# Altium PCB PCB3_aa.PcbDoc (part 3 of 4)
Units mm, origin at the board's own origin, x right, y up, seen from the top; angles counter-clockwise.
Board outline 85.6 x 54 mm, 2 copper layers (Top Layer, Bottom Layer); 41 components, 25 nets, 168 pads, 97 vias.
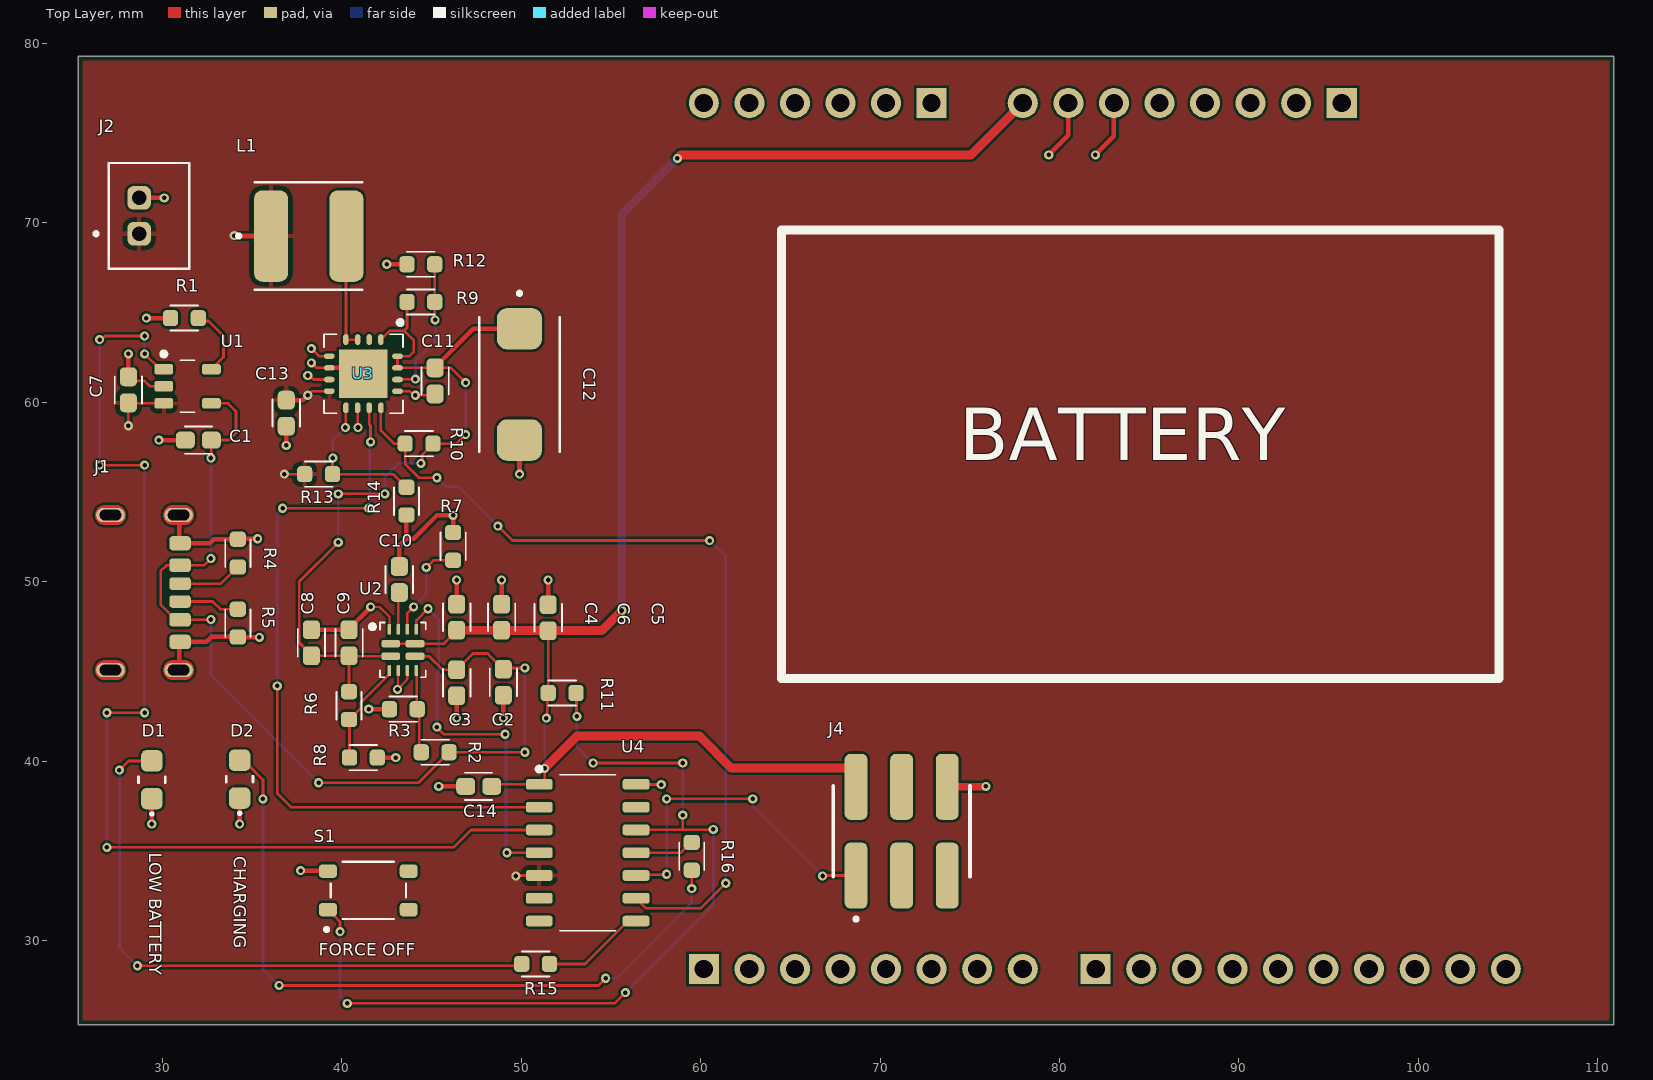
[diagram p0: Top Layer view]

## Part data (continued)
R7: library part "RESISTOR - GENERIC", "Res Thick Film 0603 21.5K Ohm 1% 0.1W(1/10W) ±100ppm/C Pad SMD T/R", .Case/Package=0603, .Tolerance=1%, Manufacturer="Yageo Group", Manufacturer Part Number=RC0603FR-0721K5L, Max Operating Temperature=155°C, Max Power Dissipation=100mW, Min Operating Temperature=-55°C, Supplier Part Number=603-RC0603FR-0721K5L, Temperature Coefficient=100ppm/°C, Voltage Rating=75V, Voltage Rating (DC)=50V, Case Code (Imperial)=0603, Case/Package=0603, Category="Chip SMD Resistors", China RoHS=Non-Compliant, ComponentLink1Description=https://datasheet.octopart.com:443/RC0603FR-0721K5L-Yageo-datasheet-175887523.pdf?src-supplier=Newark, ComponentLink1URL=https://datasheet.octopart.com:443/RC0603FR-0721K5L-Yageo-datasheet-175887523.pdf?src-supplier=Newark, ComponentLink2Description=https://datasheet.octopart.com:443/RC0603FR-0721K5L-Yageo-datasheet-103092701.pdf?src-supplier=Upverter, ComponentLink2URL=https://datasheet.octopart.com:443/RC0603FR-0721K5L-Yageo-datasheet-103092701.pdf?src-supplier=Upverter, ComponentLink3Description=https://datasheet.octopart.com:443/RC0603FR-0721K5L-Yageo-Group-datasheet-189192902.pdf?src-supplier=TME, ComponentLink3URL=https://datasheet.octopart.com:443/RC0603FR-0721K5L-Yageo-Group-datasheet-189192902.pdf?src-supplier=TME, ComponentLink4Description=https://datasheet.octopart.com:443/RC0603FR-0721K5L-Yageo-Group-datasheet-176638170.pdf?src-supplier=TME, ComponentLink4URL=https://datasheet.octopart.com:443/RC0603FR-0721K5L-Yageo-Group-datasheet-176638170.pdf?src-supplier=TME, ComponentLink5Description=https://datasheet.octopart.com:443/RC0603FR-0721K5L-Yageo-datasheet-164759695.pdf?src-supplier=Future+Electronics, ComponentLink5URL=https://datasheet.octopart.com:443/RC0603FR-0721K5L-Yageo-datasheet-164759695.pdf?src-supplier=Future+Electronics, ComponentLink6Description=https://datasheet.octopart.com:443/RC0603FR-0721K5L-Yageo-datasheet-137700087.pdf?src-supplier=Future+Electronics, ComponentLink6URL=https://datasheet.octopart.com:443/RC0603FR-0721K5L-Yageo-datasheet-137700087.pdf?src-supplier=Future+Electronics, ComponentLink7Description=https://datasheet.octopart.com:443/RC0603FR-0721K5L-Yageo-datasheet-15599030.pdf?src-supplier=Future+Electronics, ComponentLink7URL=https://datasheet.octopart.com:443/RC0603FR-0721K5L-Yageo-datasheet-15599030.pdf?src-supplier=Future+Electronics, ComponentLink8Description=https://datasheet.octopart.com:443/RC0603FR-0721K5L-Yageo-datasheet-12596169.pdf?src-supplier=Future+Electronics, ComponentLink8URL=https://datasheet.octopart.com:443/RC0603FR-0721K5L-Yageo-datasheet-12596169.pdf?src-supplier=Future+Electronics, ComponentLink9Description=https://datasheet.octopart.com:443/RC0603FR-0721K5L-Yageo-datasheet-8328172.pdf?src-supplier=Future+Electronics, ComponentLink9URL=https://datasheet.octopart.com:443/RC0603FR-0721K5L-Yageo-datasheet-8328172.pdf?src-supplier=Future+Electronics, ComponentLink10Description=https://datasheet.octopart.com/RC0603FR-0721K5L-Yageo-datasheet-73766026.pdf, ComponentLink10URL=https://datasheet.octopart.com/RC0603FR-0721K5L-Yageo-datasheet-73766026.pdf, ComponentLink11Description=https://datasheet.octopart.com:443/RC0603FR-0721K5L-Yageo-datasheet-118562.pdf?src-supplier=DigiKey, ComponentLink11URL=https://datasheet.octopart.com:443/RC0603FR-0721K5L-Yageo-datasheet-118562.pdf?src-supplier=DigiKey, ComponentLink12Description=http://sigma.octopart.com:80/conflict_mineral_statement/Yageo-company-3.pdf?src-supplier=Compliance+Statements, ComponentLink12URL=http://sigma.octopart.com:80/conflict_mineral_statement/Yageo-company-3.pdf?src-supplier=Compliance+Statements, ComponentLink13Description=http://sigma.octopart.com:80/rohs_statement/Yageo-company-2.pdf?src-supplier=Compliance+Statements, ComponentLink13URL=http://sigma.octopart.com:80/rohs_statement/Yageo-company-2.pdf?src-supplier=Compliance+Statements, Composition="Thick Film", Depth=800µm, Features="Moisture Resistant", Height=450µm, Lead Free="Lead Free", Length=1.6mm, Lifecycle Status=Production, Military Standard=Not, Mounting Technology="Surface Mount", Number of Terminals=2, Number of Terminations=2, Power Dissipation=100mW, Power Rating=100mW, Pricing="1=0,1, 10=0,006, 50=0,006, 100=0,006, 1000=0,006, 10000=0,002 (USD)", REACH SVHC=Yes, RoHS=Compliant, Schedule B="8533210045, 8533210045|8533210045, 8533210045|8533210045|8533210045, 8533210045|8533210045|8533210045|8533210045", Stock=1866808, Supplier=Mouser, Supplier 1=Mouser, Supplier Part Number 1=603-RC0603FR-0721K5L, Termination=SMD/SMT, Tolerance=1%, Width=800µm, Working Voltage=75V
R9: library part "RESISTOR - GENERIC", "Res Thick Film 0603 1.8M Ohm 1% 0.1W(1/10W) +/-100ppm/ﾟC Epoxy SMD T/R", .Case/Package=0603, .Tolerance=1%, Case Code (Metric)=1608, Manufacturer="Yageo Group", Manufacturer Part Number=RC0603FR-071M8L, Max Operating Temperature=155°C, Max Power Dissipation=100mW, Min Operating Temperature=-55°C, Supplier Part Number=YAG3328CT-ND, Temperature Coefficient=100ppm/°C, Voltage Rating=75V, Voltage Rating (AC)=50V, Case Code (Imperial)=0603, Case/Package=0603, Category="Chip SMD Resistors", China RoHS=Non-Compliant, ComponentLink1Description=https://datasheet.octopart.com:443/RC0603FR-071M8L-Yageo-datasheet-175887523.pdf?src-supplier=Newark, ComponentLink1URL=https://datasheet.octopart.com:443/RC0603FR-071M8L-Yageo-datasheet-175887523.pdf?src-supplier=Newark, ComponentLink2Description=https://datasheet.octopart.com:443/RC0603FR-071M8L-Yageo-datasheet-103092701.pdf?src-supplier=Upverter, ComponentLink2URL=https://datasheet.octopart.com:443/RC0603FR-071M8L-Yageo-datasheet-103092701.pdf?src-supplier=Upverter, ComponentLink3Description=https://datasheet.octopart.com:443/RC0603FR-071M8L-Yageo-datasheet-8328172.pdf?src-supplier=element14+APAC, ComponentLink3URL=https://datasheet.octopart.com:443/RC0603FR-071M8L-Yageo-datasheet-8328172.pdf?src-supplier=element14+APAC, ComponentLink4Description=https://datasheet.octopart.com:443/RC0603FR-071M8L-Yageo-datasheet-62067350.pdf?src-supplier=Farnell, ComponentLink4URL=https://datasheet.octopart.com:443/RC0603FR-071M8L-Yageo-datasheet-62067350.pdf?src-supplier=Farnell, ComponentLink5Description=https://datasheet.octopart.com:443/RC0603FR-071M8L-Yageo---Phycomp-datasheet-34211833.pdf?src-supplier=Farnell, ComponentLink5URL=https://datasheet.octopart.com:443/RC0603FR-071M8L-Yageo---Phycomp-datasheet-34211833.pdf?src-supplier=Farnell, ComponentLink6Description=https://datasheet.octopart.com:443/RC0603FR-071M8L-Yageo-datasheet-164759695.pdf?src-supplier=Future+Electronics, ComponentLink6URL=https://datasheet.octopart.com:443/RC0603FR-071M8L-Yageo-datasheet-164759695.pdf?src-supplier=Future+Electronics, ComponentLink7Description=https://datasheet.octopart.com:443/RC0603FR-071M8L-Yageo-datasheet-137700087.pdf?src-supplier=Future+Electronics, ComponentLink7URL=https://datasheet.octopart.com:443/RC0603FR-071M8L-Yageo-datasheet-137700087.pdf?src-supplier=Future+Electronics, ComponentLink8Description=https://datasheet.octopart.com:443/RC0603FR-071M8L-Yageo-datasheet-27584510.pdf?src-supplier=Future+Electronics, ComponentLink8URL=https://datasheet.octopart.com:443/RC0603FR-071M8L-Yageo-datasheet-27584510.pdf?src-supplier=Future+Electronics, ComponentLink9Description=https://datasheet.octopart.com:443/RC0603FR-071M8L-Yageo-datasheet-15599030.pdf?src-supplier=Future+Electronics, ComponentLink9URL=https://datasheet.octopart.com:443/RC0603FR-071M8L-Yageo-datasheet-15599030.pdf?src-supplier=Future+Electronics, ComponentLink10Description=https://datasheet.octopart.com:443/RC0603FR-071M8L-Yageo-datasheet-12596169.pdf?src-supplier=Future+Electronics, ComponentLink10URL=https://datasheet.octopart.com:443/RC0603FR-071M8L-Yageo-datasheet-12596169.pdf?src-supplier=Future+Electronics, ComponentLink11Description=https://datasheet.octopart.com:443/RC0603FR-071M8L-Yageo-datasheet-148775077.pdf?src-supplier=TME, ComponentLink11URL=https://datasheet.octopart.com:443/RC0603FR-071M8L-Yageo-datasheet-148775077.pdf?src-supplier=TME, ComponentLink12Description=https://datasheet.octopart.com/RC0603FR-071M8L-Yageo-datasheet-73766026.pdf, ComponentLink12URL=https://datasheet.octopart.com/RC0603FR-071M8L-Yageo-datasheet-73766026.pdf, ComponentLink13Description=http://sigma.octopart.com:80/rohs_statement/Yageo-company-2.pdf?src-supplier=Compliance+Statements, ComponentLink13URL=http://sigma.octopart.com:80/rohs_statement/Yageo-company-2.pdf?src-supplier=Compliance+Statements, ComponentLink14Description=http://sigma.octopart.com:80/conflict_mineral_statement/Yageo-company-3.pdf?src-supplier=Compliance+Statements, ComponentLink14URL=http://sigma.octopart.com:80/conflict_mineral_statement/Yageo-company-3.pdf?src-supplier=Compliance+Statements, Composition="Thick Film", Depth=800µm, Features="Moisture Resistant", Height=450µm, Lead Free="Lead Free", Length=1.6mm, Lifecycle Status=Production, Military Standard=Not, Mounting Technology="Surface Mount", Number of Terminals=2, Number of Terminations=2, Packaging="Cut Tape", Pins=2, Power Dissipation=100mW, Power Rating=100mW, Pricing="1=0,1, 10=0,011, 25=0,0092, 50=0,0072, 100=0,0068, 250=0,00568 (USD)", REACH SVHC=Yes, RoHS=Compliant, Schedule B="8533210045, 8533210045|8533210045|8533210045|8533210045|8533210045", Stock=2687, Supplier=DigiKey, Supplier 1=DigiKey, Supplier Part Number 1=YAG3328CT-ND, Termination=SMD/SMT, Tolerance=1%, Voltage Rating (DC)=50V, Width=800µm, Working Voltage=75V
R10: library part "RESISTOR - GENERIC", "Chip Resistor Automotive Grade Thick Film 0603 1MOhm 1% Paper T/R", .Case/Package=0603, .Tolerance=1%, Manufacturer="Yageo Group", Manufacturer Part Number=AC0603FR-7W1ML, Max Operating Temperature=155°C, Min Operating Temperature=-55°C, Power Dissipation=200mW, Supplier Part Number=13-AC0603FR-7W1MLCT-ND, Temperature Coefficient=100ppm/°C, Voltage Rating=75V, Case/Package=0603, Category="Chip SMD Resistors", China RoHS=Non-Compliant, ComponentLink1Description=https://datasheet.octopart.com:443/AC0603FR-7W1ML-Yageo-datasheet-182189377.pdf?src-supplier=IHS, ComponentLink1URL=https://datasheet.octopart.com:443/AC0603FR-7W1ML-Yageo-datasheet-182189377.pdf?src-supplier=IHS, ComponentLink2Description=https://datasheet.octopart.com:443/AC0603FR-7W1ML-Yageo-datasheet-86786639.pdf?src-supplier=Upverter, ComponentLink2URL=https://datasheet.octopart.com:443/AC0603FR-7W1ML-Yageo-datasheet-86786639.pdf?src-supplier=Upverter, ComponentLink3Description=https://datasheet.octopart.com/AC0603FR-7W1ML-Yageo-datasheet-12512238.pdf, ComponentLink3URL=https://datasheet.octopart.com/AC0603FR-7W1ML-Yageo-datasheet-12512238.pdf, ComponentLink4Description=http://sigma.octopart.com:80/rohs_statement/Yageo-company-2.pdf?src-supplier=Compliance+Statements, ComponentLink4URL=http://sigma.octopart.com:80/rohs_statement/Yageo-company-2.pdf?src-supplier=Compliance+Statements, ComponentLink5Description=http://sigma.octopart.com:80/conflict_mineral_statement/Yageo-company-3.pdf?src-supplier=Compliance+Statements, ComponentLink5URL=http://sigma.octopart.com:80/conflict_mineral_statement/Yageo-company-3.pdf?src-supplier=Compliance+Statements, Composition="Thick Film", Height=450µm, Lifecycle Status=Production, Mounting Technology="Surface Mount", Number of Terminals=2, Packaging="Tape & Reel", Power Rating=200mW, Pricing="1=0,1, 10=0,016, 25=0,0132, 50=0,0102, 100=0,0092 (USD)", REACH SVHC=Yes, RoHS=Compliant, Stock=95338, Supplier=DigiKey, Supplier 1=DigiKey, Supplier Part Number 1=13-AC0603FR-7W1MLCT-ND, Tolerance=1%, Width=800µm, Working Voltage=75V
R12: library part "RESISTOR - GENERIC", "Res Thick Film 0603 200K Ohm 1% 0.1W(1/10W) ±100ppm/C Pad SMD T/R", .Case/Package=0603, .Tolerance=1%, Manufacturer="Yageo Group", Manufacturer Part Number=RC0603FR-07200KL, Max Operating Temperature=155°C, Max Power Dissipation=100mW, Min Operating Temperature=-55°C, Supplier Part Number=311-200KHRCT-ND, Temperature Coefficient=100ppm/°C, Voltage Rating=75V, Voltage Rating (DC)=50V, Case Code (Imperial)=0603, Case/Package=0603, Category="Chip SMD Resistors", China RoHS=Non-Compliant, ComponentLink1Description=https://datasheet.octopart.com:443/RC0603FR-07200KL-Yageo-datasheet-175887523.pdf?src-supplier=IHS, ComponentLink1URL=https://datasheet.octopart.com:443/RC0603FR-07200KL-Yageo-datasheet-175887523.pdf?src-supplier=IHS, ComponentLink2Description=https://datasheet.octopart.com:443/RC0603FR-07200KL-Yageo-datasheet-141265859.pdf?src-supplier=Upverter, ComponentLink2URL=https://datasheet.octopart.com:443/RC0603FR-07200KL-Yageo-datasheet-141265859.pdf?src-supplier=Upverter, ComponentLink3Description=https://datasheet.octopart.com:443/RC0603FR-07200KL-Yageo-datasheet-103092701.pdf?src-supplier=Upverter, ComponentLink3URL=https://datasheet.octopart.com:443/RC0603FR-07200KL-Yageo-datasheet-103092701.pdf?src-supplier=Upverter, ComponentLink4Description=https://sigma.octopart.com:443/138820526/technical_drawing/Yageo-RC0603FR-07200KL.pdf?src-supplier=Upverter, ComponentLink4URL=https://sigma.octopart.com:443/138820526/technical_drawing/Yageo-RC0603FR-07200KL.pdf?src-supplier=Upverter, ComponentLink5Description=https://datasheet.octopart.com:443/RC0603FR-07200KL-Yageo-datasheet-8328172.pdf?src-supplier=Burklin+Elektronik, ComponentLink5URL=https://datasheet.octopart.com:443/RC0603FR-07200KL-Yageo-datasheet-8328172.pdf?src-supplier=Burklin+Elektronik, ComponentLink6Description=https://datasheet.octopart.com:443/RC0603FR-07200KL-Yageo-datasheet-62067350.pdf?src-supplier=Farnell, ComponentLink6URL=https://datasheet.octopart.com:443/RC0603FR-07200KL-Yageo-datasheet-62067350.pdf?src-supplier=Farnell, ComponentLink7Description=https://datasheet.octopart.com:443/RC0603FR-07200KL-Yageo-datasheet-34211833.pdf?src-supplier=element14+APAC, ComponentLink7URL=https://datasheet.octopart.com:443/RC0603FR-07200KL-Yageo-datasheet-34211833.pdf?src-supplier=element14+APAC, ComponentLink8Description=https://datasheet.octopart.com:443/RC0603FR-07200KL-Yageo-datasheet-164759695.pdf?src-supplier=Future+Electronics, ComponentLink8URL=https://datasheet.octopart.com:443/RC0603FR-07200KL-Yageo-datasheet-164759695.pdf?src-supplier=Future+Electronics, ComponentLink9Description=https://datasheet.octopart.com:443/RC0603FR-07200KL-Yageo-datasheet-137700087.pdf?src-supplier=Future+Electronics, ComponentLink9URL=https://datasheet.octopart.com:443/RC0603FR-07200KL-Yageo-datasheet-137700087.pdf?src-supplier=Future+Electronics, ComponentLink10Description=https://datasheet.octopart.com:443/RC0603FR-07200KL-Yageo-datasheet-15599030.pdf?src-supplier=Future+Electronics, ComponentLink10URL=https://datasheet.octopart.com:443/RC0603FR-07200KL-Yageo-datasheet-15599030.pdf?src-supplier=Future+Electronics, ComponentLink11Description=https://datasheet.octopart.com:443/RC0603FR-07200KL-Yageo-datasheet-12596169.pdf?src-supplier=Future+Electronics, ComponentLink11URL=https://datasheet.octopart.com:443/RC0603FR-07200KL-Yageo-datasheet-12596169.pdf?src-supplier=Future+Electronics, ComponentLink12Description=https://datasheet.octopart.com:443/RC0603FR-07200KL-Yageo-datasheet-8324193.pdf?src-supplier=Future+Electronics, ComponentLink12URL=https://datasheet.octopart.com:443/RC0603FR-07200KL-Yageo-datasheet-8324193.pdf?src-supplier=Future+Electronics, ComponentLink13Description=https://datasheet.octopart.com:443/RC0603FR-07200KL-Yageo-datasheet-148775077.pdf?src-supplier=TME, ComponentLink13URL=https://datasheet.octopart.com:443/RC0603FR-07200KL-Yageo-datasheet-148775077.pdf?src-supplier=TME, ComponentLink14Description=https://datasheet.octopart.com:443/RC0603FR-07200KL-Yageo-datasheet-79472498.pdf?src-supplier=Megastar, ComponentLink14URL=https://datasheet.octopart.com:443/RC0603FR-07200KL-Yageo-datasheet-79472498.pdf?src-supplier=Megastar, ComponentLink15Description=https://datasheet.octopart.com/RC0603FR-07200KL-Yageo-datasheet-73766026.pdf, ComponentLink15URL=https://datasheet.octopart.com/RC0603FR-07200KL-Yageo-datasheet-73766026.pdf, ComponentLink16Description=https://datasheet.octopart.com:443/RC0603FR-07200KL-Yageo-datasheet-118562.pdf?src-supplier=DigiKey, ComponentLink16URL=https://datasheet.octopart.com:443/RC0603FR-07200KL-Yageo-datasheet-118562.pdf?src-supplier=DigiKey, ComponentLink17Description=http://sigma.octopart.com:80/rohs_statement/Yageo-company-2.pdf?src-supplier=Compliance+Statements, ComponentLink17URL=http://sigma.octopart.com:80/rohs_statement/Yageo-company-2.pdf?src-supplier=Compliance+Statements, ComponentLink18Description=http://sigma.octopart.com:80/conflict_mineral_statement/Yageo-company-3.pdf?src-supplier=Compliance+Statements, ComponentLink18URL=http://sigma.octopart.com:80/conflict_mineral_statement/Yageo-company-3.pdf?src-supplier=Compliance+Statements, Composition="Thick Film", Depth=800µm, Features="Moisture Resistant", Height=450µm, Lead Free="Lead Free", Length=1.6mm, Lifecycle Status=Production, Military Standard=Not, Mounting Technology="Surface Mount", Number of Terminals=2, Number of Terminations=2, Packaging="Tape & Reel", Pins=2, Power Dissipation=100mW, Power Rating=100mW, Pricing="1=0,1, 10=0,008, 25=0,0076, 50=0,0072, 100=0,0051 (USD)", REACH SVHC=Yes, RoHS=Compliant, Schedule B="8533210045, 8533210045|8533210045, 8533210045|8533210045|8533210045, 8533210045|8533210045|8533210045|8533210045", Stock=343076, Supplier=DigiKey, Supplier 1=DigiKey, Supplier Part Number 1=311-200KHRCT-ND, Termination=SMD/SMT, Tolerance=1%, Width=800µm, Working Voltage=75V
R13: library part "RESISTOR - GENERIC", "Res Thick Film 0603 2.1M Ohm 1% 1/10W ±100ppm/°C Molded SMD SMD Paper T/R", .Case/Package=0603, .Tolerance=1%, Case Code (Metric)=1608, Manufacturer="Yageo Group", Manufacturer Part Number=RC0603FR-072M1L, Max Operating Temperature=155°C, Max Power Dissipation=100mW, Min Operating Temperature=-55°C, Supplier Part Number=13-RC0603FR-072M1LCT-ND, Temperature Coefficient=100ppm/°C, Voltage Rating=75V, Case Code (Imperial)=0603, Case/Package=0603, Category="Chip SMD Resistors", China RoHS=Non-Compliant, ComponentLink1Description=https://datasheet.octopart.com:443/RC0603FR-072M1L-Yageo-datasheet-175887523.pdf?src-supplier=IHS, ComponentLink1URL=https://datasheet.octopart.com:443/RC0603FR-072M1L-Yageo-datasheet-175887523.pdf?src-supplier=IHS, ComponentLink2Description=https://datasheet.octopart.com:443/RC0603FR-072M1L-Yageo-datasheet-103092701.pdf?src-supplier=Upverter, ComponentLink2URL=https://datasheet.octopart.com:443/RC0603FR-072M1L-Yageo-datasheet-103092701.pdf?src-supplier=Upverter, ComponentLink3Description=https://datasheet.octopart.com/RC0603FR-072M1L-Yageo-datasheet-73766026.pdf, ComponentLink3URL=https://datasheet.octopart.com/RC0603FR-072M1L-Yageo-datasheet-73766026.pdf, ComponentLink4Description=https://datasheet.octopart.com:443/RC0603FR-072M1L-Yageo-datasheet-8328172.pdf?src-supplier=_legacy+Avnet, ComponentLink4URL=https://datasheet.octopart.com:443/RC0603FR-072M1L-Yageo-datasheet-8328172.pdf?src-supplier=_legacy+Avnet, ComponentLink5Description=http://sigma.octopart.com:80/rohs_statement/Yageo-company-2.pdf?src-supplier=Compliance+Statements, ComponentLink5URL=http://sigma.octopart.com:80/rohs_statement/Yageo-company-2.pdf?src-supplier=Compliance+Statements, ComponentLink6Description=http://sigma.octopart.com:80/conflict_mineral_statement/Yageo-company-3.pdf?src-supplier=Compliance+Statements, ComponentLink6URL=http://sigma.octopart.com:80/conflict_mineral_statement/Yageo-company-3.pdf?src-supplier=Compliance+Statements, Composition="Thick Film", Contact Plating=Tin, Features="Moisture Resistant", Height=450µm, Length=1.6002mm, Lifecycle Status=Production, Mounting Technology="Surface Mount", Number of Terminals=2, Number of Terminations=2, Packaging="Tape & Reel", Power Dissipation=100mW, Power Rating=100mW, Pricing="1=0,1, 10=0,007, 25=0,0052 (USD)", Radiation Hardening=No, REACH SVHC=Yes, RoHS=Compliant, Schedule B="8533210045, 8533210045|8533210045|8533210045|8533210045|8533210045", Stock=19743, Supplier=DigiKey, Supplier 1=DigiKey, Supplier Part Number 1=13-RC0603FR-072M1LCT-ND, Termination=SMD/SMT, Tolerance=1%, Width=800µm, Working Voltage=75V
R14: library part "RESISTOR - GENERIC", "Res Thick Film 0603 390K Ohm 1% 0.1W(1/10W) ±100ppm/C Pad SMD T/R", .Case/Package=0603, .Tolerance=1%, Manufacturer="Yageo Group", Manufacturer Part Number=RC0603FR-07390KL, Max Operating Temperature=155°C, Max Power Dissipation=100mW, Min Operating Temperature=-55°C, Supplier Part Number=311-390KHRCT-ND, Temperature Coefficient=100ppm/°C, Voltage Rating=75V, Voltage Rating (AC)=50V, Case Code (Imperial)=0603, Case/Package=0603, Category="Chip SMD Resistors", China RoHS=Non-Compliant, ComponentLink1Description=https://datasheet.octopart.com:443/RC0603FR-07390KL-Yageo-datasheet-175887523.pdf?src-supplier=IHS, ComponentLink1URL=https://datasheet.octopart.com:443/RC0603FR-07390KL-Yageo-datasheet-175887523.pdf?src-supplier=IHS, ComponentLink2Description=https://datasheet.octopart.com:443/RC0603FR-07390KL-Yageo-datasheet-103092701.pdf?src-supplier=Upverter, ComponentLink2URL=https://datasheet.octopart.com:443/RC0603FR-07390KL-Yageo-datasheet-103092701.pdf?src-supplier=Upverter, ComponentLink3Description=https://datasheet.octopart.com:443/RC0603FR-07390KL-Yageo-datasheet-8328172.pdf?src-supplier=Newark, ComponentLink3URL=https://datasheet.octopart.com:443/RC0603FR-07390KL-Yageo-datasheet-8328172.pdf?src-supplier=Newark, ComponentLink4Description=https://datasheet.octopart.com:443/RC0603FR-07390KL-Yageo-datasheet-62067350.pdf?src-supplier=Newark, ComponentLink4URL=https://datasheet.octopart.com:443/RC0603FR-07390KL-Yageo-datasheet-62067350.pdf?src-supplier=Newark, ComponentLink5Description=https://datasheet.octopart.com:443/RC0603FR-07390KL-Yageo-datasheet-164759695.pdf?src-supplier=Future+Electronics, ComponentLink5URL=https://datasheet.octopart.com:443/RC0603FR-07390KL-Yageo-datasheet-164759695.pdf?src-supplier=Future+Electronics, ComponentLink6Description=https://datasheet.octopart.com:443/RC0603FR-07390KL-Yageo-datasheet-137700087.pdf?src-supplier=Future+Electronics, ComponentLink6URL=https://datasheet.octopart.com:443/RC0603FR-07390KL-Yageo-datasheet-137700087.pdf?src-supplier=Future+Electronics, ComponentLink7Description=https://datasheet.octopart.com:443/RC0603FR-07390KL-Yageo-datasheet-127823281.pdf?src-supplier=Future+Electronics, ComponentLink7URL=https://datasheet.octopart.com:443/RC0603FR-07390KL-Yageo-datasheet-127823281.pdf?src-supplier=Future+Electronics, ComponentLink8Description=https://datasheet.octopart.com:443/RC0603FR-07390KL-Yageo-datasheet-27584510.pdf?src-supplier=Future+Electronics, ComponentLink8URL=https://datasheet.octopart.com:443/RC0603FR-07390KL-Yageo-datasheet-27584510.pdf?src-supplier=Future+Electronics, ComponentLink9Description=https://datasheet.octopart.com:443/RC0603FR-07390KL-Yageo-datasheet-15599030.pdf?src-supplier=Future+Electronics, ComponentLink9URL=https://datasheet.octopart.com:443/RC0603FR-07390KL-Yageo-datasheet-15599030.pdf?src-supplier=Future+Electronics, ComponentLink10Description=https://datasheet.octopart.com:443/RC0603FR-07390KL-Yageo-datasheet-12596169.pdf?src-supplier=Future+Electronics, ComponentLink10URL=https://datasheet.octopart.com:443/RC0603FR-07390KL-Yageo-datasheet-12596169.pdf?src-supplier=Future+Electronics, ComponentLink11Description=https://datasheet.octopart.com:443/RC0603FR-07390KL-Yageo-datasheet-148775077.pdf?src-supplier=TME, ComponentLink11URL=https://datasheet.octopart.com:443/RC0603FR-07390KL-Yageo-datasheet-148775077.pdf?src-supplier=TME, ComponentLink12Description=https://datasheet.octopart.com/RC0603FR-07390KL-Yageo-datasheet-73766026.pdf, ComponentLink12URL=https://datasheet.octopart.com/RC0603FR-07390KL-Yageo-datasheet-73766026.pdf, ComponentLink13Description=https://datasheet.octopart.com:443/RC0603FR-07390KL-Yageo-datasheet-118562.pdf?src-supplier=DigiKey, ComponentLink13URL=https://datasheet.octopart.com:443/RC0603FR-07390KL-Yageo-datasheet-118562.pdf?src-supplier=DigiKey, ComponentLink14Description=http://sigma.octopart.com:80/rohs_statement/Yageo-company-2.pdf?src-supplier=Compliance+Statements, ComponentLink14URL=http://sigma.octopart.com:80/rohs_statement/Yageo-company-2.pdf?src-supplier=Compliance+Statements, ComponentLink15Description=http://sigma.octopart.com:80/conflict_mineral_statement/Yageo-company-3.pdf?src-supplier=Compliance+Statements, ComponentLink15URL=http://sigma.octopart.com:80/conflict_mineral_statement/Yageo-company-3.pdf?src-supplier=Compliance+Statements, Composition="Thick Film", Depth=800µm, Features="Moisture Resistant", Height=450µm, Lead Free="Lead Free", Length=1.6mm, Lifecycle Status=Production, Military Standard=Not, Mounting Technology="Surface Mount", Number of Terminals=2, Number of Terminations=2, Pins=2, Power Dissipation=100mW, Power Rating=100mW, Pricing="1=0,1, 10=0,007, 25=0,0068, 50=0,0062, 100=0,0051 (USD)", REACH SVHC=Yes, RoHS=Compliant, Schedule B="8533210045, 8533210045|8533210045, 8533210045|8533210045|8533210045, 8533210045|8533210045|8533210045|8533210045", Stock=23907, Supplier=DigiKey, Supplier 1=DigiKey, Supplier Part Number 1=311-390KHRCT-ND, Termination=SMD/SMT, Tolerance=1%, Voltage Rating (DC)=50V, Width=800µm, Working Voltage=75V
R15 R16: library part "RESISTOR - GENERIC", "Fixed Resistor, Thin Film, 0.1W, 470ohm, 75V, 1% +/-Tol, 50ppm/Cel, Surface Mount, 0603", .Case/Package=0603, .Tolerance=1%, Manufacturer="Yageo Group", Manufacturer Part Number=RT0603FRE07470RL, Max Operating Temperature=155°C, Min Operating Temperature=-55°C, Power Dissipation=100mW, Supplier Part Number=YAG5742CT-ND, Temperature Coefficient=50ppm/°C, Voltage Rating=75V, Case Code (Imperial)=0603, Case/Package=0603, Category="Chip SMD Resistors", China RoHS=Non-Compliant, ComponentLink1Description=https://datasheet.octopart.com:443/RT0603FRE07470RL-Yageo-datasheet-176402239.pdf?src-supplier=IHS, ComponentLink1URL=https://datasheet.octopart.com:443/RT0603FRE07470RL-Yageo-datasheet-176402239.pdf?src-supplier=IHS, ComponentLink2Description=https://datasheet.octopart.com:443/RT0603FRE07470RL-Yageo-datasheet-96443642.pdf?src-supplier=Upverter, ComponentLink2URL=https://datasheet.octopart.com:443/RT0603FRE07470RL-Yageo-datasheet-96443642.pdf?src-supplier=Upverter, ComponentLink3Description=https://datasheet.octopart.com:443/RT0603FRE07470RL-Yageo-Group-datasheet-188167888.pdf?src-supplier=TME, ComponentLink3URL=https://datasheet.octopart.com:443/RT0603FRE07470RL-Yageo-Group-datasheet-188167888.pdf?src-supplier=TME, ComponentLink4Description=https://datasheet.octopart.com:443/RT0603FRE07470RL-Yageo-datasheet-67645616.pdf?src-supplier=element14+APAC, ComponentLink4URL=https://datasheet.octopart.com:443/RT0603FRE07470RL-Yageo-datasheet-67645616.pdf?src-supplier=element14+APAC, ComponentLink5Description=https://datasheet.octopart.com:443/RT0603FRE07470RL-Yageo-datasheet-10915759.pdf?src-supplier=element14+APAC, ComponentLink5URL=https://datasheet.octopart.com:443/RT0603FRE07470RL-Yageo-datasheet-10915759.pdf?src-supplier=element14+APAC, ComponentLink6Description=https://datasheet.octopart.com:443/RT0603FRE07470RL-Yageo-datasheet-8324589.pdf?src-supplier=Newark, ComponentLink6URL=https://datasheet.octopart.com:443/RT0603FRE07470RL-Yageo-datasheet-8324589.pdf?src-supplier=Newark, ComponentLink7Description=https://datasheet.octopart.com:443/RT0603FRE07470RL-Yageo-datasheet-164439670.pdf?src-supplier=Newark, ComponentLink7URL=https://datasheet.octopart.com:443/RT0603FRE07470RL-Yageo-datasheet-164439670.pdf?src-supplier=Newark, ComponentLink8Description=https://datasheet.octopart.com:443/RT0603FRE07470RL-Yageo-datasheet-169971040.pdf?src-supplier=Future+Electronics, ComponentLink8URL=https://datasheet.octopart.com:443/RT0603FRE07470RL-Yageo-datasheet-169971040.pdf?src-supplier=Future+Electronics, ComponentLink9Description=https://datasheet.octopart.com:443/RT0603FRE07470RL-Yageo-datasheet-166250672.pdf?src-supplier=Future+Electronics, ComponentLink9URL=https://datasheet.octopart.com:443/RT0603FRE07470RL-Yageo-datasheet-166250672.pdf?src-supplier=Future+Electronics, ComponentLink10Description=https://datasheet.octopart.com:443/RT0603FRE07470RL-Yageo-datasheet-137700930.pdf?src-supplier=Future+Electronics, ComponentLink10URL=https://datasheet.octopart.com:443/RT0603FRE07470RL-Yageo-datasheet-137700930.pdf?src-supplier=Future+Electronics, ComponentLink11Description=https://datasheet.octopart.com:443/RT0603FRE07470RL-Yageo-Group-datasheet-141265893.pdf?src-supplier=ODG+(Origin+Data+Global), ComponentLink11URL=https://datasheet.octopart.com:443/RT0603FRE07470RL-Yageo-Group-datasheet-141265893.pdf?src-supplier=ODG+(Origin+Data+Global), ComponentLink12Description=https://datasheet.octopart.com/RT0603FRE07470RL-Yageo-datasheet-86813807.pdf, ComponentLink12URL=https://datasheet.octopart.com/RT0603FRE07470RL-Yageo-datasheet-86813807.pdf, ComponentLink13Description=http://sigma.octopart.com:80/rohs_statement/Yageo-company-2.pdf?src-supplier=Compliance+Statements, ComponentLink13URL=http://sigma.octopart.com:80/rohs_statement/Yageo-company-2.pdf?src-supplier=Compliance+Statements, ComponentLink14Description=http://sigma.octopart.com:80/conflict_mineral_statement/Yageo-company-3.pdf?src-supplier=Compliance+Statements, ComponentLink14URL=http://sigma.octopart.com:80/conflict_mineral_statement/Yageo-company-3.pdf?src-supplier=Compliance+Statements, Composition="Thin Film", Depth=800µm, Height=450µm, Lead Free="Lead Free", Length=1.6mm, Lifecycle Status=Production, Military Standard=Not, Mounting Technology="Surface Mount", Number of Terminals=2, Pins=2, Power Rating=100mW, Pricing="1=0,1, 10=0,010, 25=0,0096, 50=0,0092, 100=0,0087, 250=0,00808, 1000=0,00764 (USD)", REACH SVHC=Yes, RoHS=Compliant, Schedule B="8533210045, 8533210045|8533210045|8533210045|8533210045|8533210045|8533210045|8533210045|8533210045|8533210045|8533210045|8533210045|8533210045|8533210045|8533210045, 8533210045|8533210045|8533210045|8533210045|8533210045|8533210045|8533210045|8533210045|8533210045|8533210045|8533210045|8533210045|8533210045|8533210045|8533210045, 8533210045|8533210045|8533210045|8533210045|8533210045|8533210045|8533210045|8533210045|8533210045|8533210045|8533210045|8533210045|8533210045|8533210045|8533210045|8533210045", Stock=23049, Supplier=DigiKey, Supplier 1=DigiKey, Supplier Part Number 1=YAG5742CT-ND, Termination=SMD/SMT, Tolerance=1%, Voltage Rating (DC)=75V, Width=800µm, Working Voltage=75V
S1: "Switch Tactile N.O. SPST Button Gull Wing 0.05A 12VDC 100000Cycles 1.77N SMD", Contact Resistance=100mΩ, Insulation Resistance=100MΩ, Manufacturer=E-Switch, Max Current Rating=50mA, Max Operating Temperature=70°C, Max Voltage Rating (DC)=12V, Min Operating Temperature=-20°C, Operating Force=1.76N, Package=None, Supplier Part Number=EG5384CT-ND, Category="Tactile Switches", Check_prices=https://www.snapeda.com/parts/TL3365AF180QG/E-Switch/view-part/?ref=eda, ComponentLink1Description=https://datasheet.octopart.com:443/TL3365AF180QG-E-Switch-datasheet-182203474.pdf?src-supplier=IHS, ComponentLink1URL=https://datasheet.octopart.com:443/TL3365AF180QG-E-Switch-datasheet-182203474.pdf?src-supplier=IHS, ComponentLink2Description=https://datasheet.octopart.com:443/TL3365AF180QG-E-Switch-datasheet-188936971.pdf?src-supplier=TME, ComponentLink2URL=https://datasheet.octopart.com:443/TL3365AF180QG-E-Switch-datasheet-188936971.pdf?src-supplier=TME, ComponentLink3Description=https://datasheet.octopart.com:443/TL3365AF180QG-E-Switch-datasheet-62330653.pdf?src-supplier=Electro+Sonic, ComponentLink3URL=https://datasheet.octopart.com:443/TL3365AF180QG-E-Switch-datasheet-62330653.pdf?src-supplier=Electro+Sonic, ComponentLink4Description=https://datasheet.octopart.com:443/TL3365AF180QG-E-Switch-datasheet-181955371.pdf?src-supplier=Farnell, ComponentLink4URL=https://datasheet.octopart.com:443/TL3365AF180QG-E-Switch-datasheet-181955371.pdf?src-supplier=Farnell, ComponentLink5Description=https://datasheet.octopart.com:443/TL3365AF180QG-E-Switch-datasheet-62330039.pdf?src-supplier=Newark, ComponentLink5URL=https://datasheet.octopart.com:443/TL3365AF180QG-E-Switch-datasheet-62330039.pdf?src-supplier=Newark, ComponentLink6Description=https://datasheet.octopart.com:443/TL3365AF180QG-E-Switch-datasheet-155697103.pdf?src-supplier=RS+(Formerly+Allied+Electronics), ComponentLink6URL=https://datasheet.octopart.com:443/TL3365AF180QG-E-Switch-datasheet-155697103.pdf?src-supplier=RS+(Formerly+Allied+Electronics), Contact Material=Silver, Electrical Life=100kcycles, Height=1.55mm, Illumination Type=Non-Illuminated, Lead Free="Lead Free", Length=4.2mm, Lifecycle Status=Production, Manufacturer Part Number=TL3365AF180QG, Mechanical Life=100kcycles, MF=E-Switch, Mounting Technology="Surface Mount", MP=TL3365AF180QG, Number of Positions=1, Pricing="1=0,21, 10=0,181, 25=0,1696, 100=0,1522, 250=0,1412, 500=0,13324, 1000=0,12576 (USD)", REACH SVHC=Yes, RoHS=Compliant, SnapEDA_Link=https://www.snapeda.com/parts/TL3365AF180QG/E-Switch/view-part/?ref=snap, Stock=31658, Supplier=DigiKey, Supplier 1=DigiKey, Supplier Part Number 1=EG5384CT-ND, Switch Function=Off-Mom, Switch Travel=200µm, Termination="Gull Wing", Throw Configuration=SPST
U1: "Linear Battery Charger Controller Li-Ion/Li-Pol 505mA 4.2V 5-Pin SOT-23 T/R", Ambient Temperature Range High=85°C, Case/Package=SOT-23-5, Manufacturer=Microchip, Max Charge Current=500mA, Max Junction Temperature (Tj)=125°C, Max Output Voltage=4.232V, Max Supply Voltage=3.75V, Min Operating Temperature=-40°C, Min Output Voltage=4.168V, Nominal Supply Voltage=6V, Operating Supply Current=510µA, Output Voltage=4.2V, Supplier Part Number=MCP73831T-2DCI/OTCT-ND, Category="Battery Management", ComponentLink1Description=https://datasheet.octopart.com:443/MCP73831T-2DCI/OT-Microchip-datasheet-8814540.pdf?src-supplier=Electro+Sonic, ComponentLink1URL=https://datasheet.octopart.com:443/MCP73831T-2DCI/OT-Microchip-datasheet-8814540.pdf?src-supplier=Electro+Sonic, ComponentLink2Description=https://datasheet.octopart.com:443/MCP73831T-2DCI-OT-Microchip-datasheet-16123459.pdf?src-supplier=Upverter, ComponentLink2URL=https://datasheet.octopart.com:443/MCP73831T-2DCI-OT-Microchip-datasheet-16123459.pdf?src-supplier=Upverter, ComponentLink3Description=https://datasheet.octopart.com:443/MCP73831T-2DCI-OT-Microchip-datasheet-34193478.pdf?src-supplier=Farnell, ComponentLink3URL=https://datasheet.octopart.com:443/MCP73831T-2DCI-OT-Microchip-datasheet-34193478.pdf?src-supplier=Farnell, ComponentLink4Description=https://datasheet.octopart.com:443/MCP73831T-2DCI-OT-Microchip-datasheet-145017548.pdf?src-supplier=Microchip, ComponentLink4URL=https://datasheet.octopart.com:443/MCP73831T-2DCI-OT-Microchip-datasheet-145017548.pdf?src-supplier=Microchip, ComponentLink5Description=https://datasheet.octopart.com:443/MCP73831T-2DCI-OT-Microchip-datasheet-16593012.pdf?src-supplier=element14+APAC, ComponentLink5URL=https://datasheet.octopart.com:443/MCP73831T-2DCI-OT-Microchip-datasheet-16593012.pdf?src-supplier=element14+APAC, ComponentLink6Description=https://datasheet.octopart.com:443/MCP73831T-2DCI-OT-Microchip-datasheet-158592061.pdf?src-supplier=SHENGYU+ELECTRONICS, ComponentLink6URL=https://datasheet.octopart.com:443/MCP73831T-2DCI-OT-Microchip-datasheet-158592061.pdf?src-supplier=SHENGYU+ELECTRONICS, ComponentLink7Description=https://datasheet.octopart.com:443/MCP73831T-2DCI/OT-Microchip-datasheet-98419.pdf?src-supplier=Mouser, ComponentLink7URL=https://datasheet.octopart.com:443/MCP73831T-2DCI/OT-Microchip-datasheet-98419.pdf?src-supplier=Mouser, ComponentLink8Description=https://datasheet.octopart.com:443/MCP73831T-2DCI/OT-Microchip-datasheet-39874.pdf?src-supplier=DigiKey, ComponentLink8URL=https://datasheet.octopart.com:443/MCP73831T-2DCI/OT-Microchip-datasheet-39874.pdf?src-supplier=DigiKey, ComponentLink9Description=http://sigma.octopart.com:80/188449423/materials_sheet/Microchip-MCP73831T-2DCI-OT.pdf?src-supplier=Compliance+Statements, ComponentLink9URL=http://sigma.octopart.com:80/188449423/materials_sheet/Microchip-MCP73831T-2DCI-OT.pdf?src-supplier=Compliance+Statements, ComponentLink10Description=http://sigma.octopart.com:80/conflict_mineral_statement/Microchip-company-68.pdf?src-supplier=Compliance+Statements, ComponentLink10URL=http://sigma.octopart.com:80/conflict_mineral_statement/Microchip-company-68.pdf?src-supplier=Compliance+Statements, ComponentLink11Description=http://sigma.octopart.com:80/conflict_mineral_statement/Microchip-company-69.pdf?src-supplier=Compliance+Statements, ComponentLink11URL=http://sigma.octopart.com:80/conflict_mineral_statement/Microchip-company-69.pdf?src-supplier=Compliance+Statements, ComponentLink12Description=http://sigma.octopart.com:80/reach_statement/Microchip-company-70.pdf?src-supplier=Compliance+Statements, ComponentLink12URL=http://sigma.octopart.com:80/reach_statement/Microchip-company-70.pdf?src-supplier=Compliance+Statements, ComponentLink13Description=http://sigma.octopart.com:80/rohs_statement/Microchip-company-71.pdf?src-supplier=Compliance+Statements, ComponentLink13URL=http://sigma.octopart.com:80/rohs_statement/Microchip-company-71.pdf?src-supplier=Compliance+Statements, Contact Plating=Tin, Country of Assembly=Thailand, Country of Fabrication="United States of America", Country of Origin=Thailand, Export Control Classification Number (ECCN) Code=EAR99, Harmonized Tariff Schedule (HTS) Code=8542.39.0060, Height=1.45mm, Introduction Date=2005-11-03, Length=3.1mm, Lifecycle Status=Production, Manufacturer Part Number=MCP73831T-2DCI/OT, Max Operating Temperature=85°C, Max Output current=500mA, Min Supply Voltage=3.75V, Mounting Technology="Surface Mount", Number of Cells=1, Number of Channels=1, Number of Outputs=1, Output Current=500mA, Pins=5, Pricing="1=0,76, 25=0,63, 100=0,6125 (USD)", Projected EOL Date=2034-11-03, Radiation Hardening=No, REACH SVHC=No, RoHS=Compliant, Schedule B="8542390000, 8542390000|8542390000|8542390000|8542390000|8542390000", Stock=7422, Supplier=DigiKey, Supplier 1=DigiKey, Supplier Part Number 1=MCP73831T-2DCI/OTCT-ND, Width=1.8mm
U2: "2.7-V to 22-V, 56-mΩ, 4.5-A, power mux with seamless switchover 12-VQFN-HR -40 to 125", Manufacturer="Texas Instruments", Manufacturer Lifecycle Status=ACTIVE, Max Junction Temperature (Tj)=125°C, Max Supply Voltage=22V, Min Operating Temperature=-40°C, Min Supply Voltage=2.8V, Nominal Supply Current=300µA, Supplier Part Number=296-53410-1-ND, Category="Power Management ICs", ComponentLink1Description=https://octopart.com:443/opatz8j6/c1?t=u__eRulNICzvJgw_uF5jZE4VewBqqVxAEhH6a5865kfiBS97munyJHNwR89MOISaNIlCSIK0p6tyYn4vgEUwA00NusdUrfnqEnnmQHin85Zj7Xz-CnabDGGSIMRYEyZQyUZ9_1lQhHv-e10ijzu5Fv9_tN07M4ouzl3dHDLjVRc4zqqNSbdG7ZpopHa8efgiYSe1iOCqV1SOo3tsaJDthmCWARnaKZ9V2q5WV2HmYoAlkLRJzefOURIjiIua_VTxhiCJdWFvuMhq2aqOyeKhwV9xg5H8ABnwy4ffoCjAbE9kSmNx4Gy2EKE46MjxT9GaZ6IXNuY9WZuTkrZzflCjnBM8kCWZn_jdciZqHXwHUUgC-0cOcFywywnpHLiGbymgn1lU5mc&src-supplier=Texas+Instruments, ComponentLink1URL=https://octopart.com:443/opatz8j6/c1?t=u__eRulNICzvJgw_uF5jZE4VewBqqVxAEhH6a5865kfiBS97munyJHNwR89MOISaNIlCSIK0p6tyYn4vgEUwA00NusdUrfnqEnnmQHin85Zj7Xz-CnabDGGSIMRYEyZQyUZ9_1lQhHv-e10ijzu5Fv9_tN07M4ouzl3dHDLjVRc4zqqNSbdG7ZpopHa8efgiYSe1iOCqV1SOo3tsaJDthmCWARnaKZ9V2q5WV2HmYoAlkLRJzefOURIjiIua_VTxhiCJdWFvuMhq2aqOyeKhwV9xg5H8ABnwy4ffoCjAbE9kSmNx4Gy2EKE46MjxT9GaZ6IXNuY9WZuTkrZzflCjnBM8kCWZn_jdciZqHXwHUUgC-0cOcFywywnpHLiGbymgn1lU5mc&src-supplier=Texas+Instruments, ComponentLink2Description=http://sigma.octopart.com:80/conflict_mineral_statement/Texas-Instruments-company-63.pdf?src-supplier=Compliance+Statements, ComponentLink2URL=http://sigma.octopart.com:80/conflict_mineral_statement/Texas-Instruments-company-63.pdf?src-supplier=Compliance+Statements, ComponentLink3Description=http://sigma.octopart.com:80/reach_statement/Texas-Instruments-company-64.pdf?src-supplier=Compliance+Statements, ComponentLink3URL=http://sigma.octopart.com:80/reach_statement/Texas-Instruments-company-64.pdf?src-supplier=Compliance+Statements, Height=1mm, Length=2.5mm, Lifecycle Status=Production, Manufacturer Part Number=TPS2121RUXR, Max Operating Temperature=125°C, Number of Outputs=1, Output Voltage=22V, Pins=12, Pricing="1=2,37, 10=1,76, 25=1,6072, 100=1,4391, 250=1,35892, 500=1,31058, 1000=1,27078 (USD)", RoHS=Compliant, Schedule B="8542390000, 8542390000|8542390000|8542390000|8542390000|8542390000", Stock=9752, Supplier=DigiKey, Supplier 1=DigiKey, Supplier Part Number 1=296-53410-1-ND, Thickness=900µm, Width=2mm
U3: "Conv DC-DC 1.8V to 5.5V Synchronous Step Up Single-Out 1.8V to 5.5V 0.5A 16-Pin VQFN EP T/R", Case/Package=VQFN, Manufacturer="Texas Instruments", Manufacturer Lifecycle Status=ACTIVE, Max Operating Temperature=85°C, Max Output current=500mA, Max Output Voltage=5.5V, Min Input Voltage=1.8V, Min Operating Temperature=-40°C, Output Current=2A, Quiescent Current=20µA, Supplier Part Number=296-15259-1-ND, Switching Frequency=600kHz, Category="Voltage Regulators - Switching", ComponentLink1Description=https://sigma.octopart.com:443/179129134/technical_drawing/Texas-Instruments-TPS61090RSAR.pdf?src-supplier=Texas+Instruments, ComponentLink1URL=https://sigma.octopart.com:443/179129134/technical_drawing/Texas-Instruments-TPS61090RSAR.pdf?src-supplier=Texas+Instruments, ComponentLink2Description=https://octopart.com:443/opatz8j6/c1?t=AcQooj3JlTCfhk3VCQUH-aAEBr0wyTfCDEA-x6NEZ2xxPhV97yYYZYKTTzI7ie9NC3rdJUsYEK6CyX6awGzEEcrHtZ_ArfXYtmPr4gKKxI6Kw8agxWkgC3a2xDsXlg-O0fwghwbpb1suK4tlMeroK7wll2-51HzAXEG_iTs83j7TVMfk2sV4EMpy0PTSYrurZmHHqCG8wItxv2OJGrxcCnvFFnZFhd76piKxGXXAjHyftSJJey1je6ukqBFTD2_84SHs_29Ug4OcTy7-Co2GNmDvY-nPAqSt9tN4wM5hyRbOZfDv3RSxiNHdEGiQsBGArixu2cBpknAywPbL-YnUby8ljK6CPTzRMlcqP5D6VeYBdVJmVC4HGqOiiiiHSo5hvGoQOQ&src-supplier=Texas+Instruments, ComponentLink2URL=https://octopart.com:443/opatz8j6/c1?t=AcQooj3JlTCfhk3VCQUH-aAEBr0wyTfCDEA-x6NEZ2xxPhV97yYYZYKTTzI7ie9NC3rdJUsYEK6CyX6awGzEEcrHtZ_ArfXYtmPr4gKKxI6Kw8agxWkgC3a2xDsXlg-O0fwghwbpb1suK4tlMeroK7wll2-51HzAXEG_iTs83j7TVMfk2sV4EMpy0PTSYrurZmHHqCG8wItxv2OJGrxcCnvFFnZFhd76piKxGXXAjHyftSJJey1je6ukqBFTD2_84SHs_29Ug4OcTy7-Co2GNmDvY-nPAqSt9tN4wM5hyRbOZfDv3RSxiNHdEGiQsBGArixu2cBpknAywPbL-YnUby8ljK6CPTzRMlcqP5D6VeYBdVJmVC4HGqOiiiiHSo5hvGoQOQ&src-supplier=Texas+Instruments, ComponentLink3Description=https://datasheet.octopart.com:443/TPS61090RSAR-Texas-Instruments-datasheet-10258986.pdf?src-supplier=Texas+Instruments, ComponentLink3URL=https://datasheet.octopart.com:443/TPS61090RSAR-Texas-Instruments-datasheet-10258986.pdf?src-supplier=Texas+Instruments, ComponentLink4Description=https://sigma.octopart.com:443/49250404/technical_drawing/Texas-Instruments-TPS61090RSAR.pdf?src-supplier=Texas+Instruments, ComponentLink4URL=https://sigma.octopart.com:443/49250404/technical_drawing/Texas-Instruments-TPS61090RSAR.pdf?src-supplier=Texas+Instruments, ComponentLink5Description=https://datasheet.octopart.com:443/TPS61090RSAR-Texas-Instruments-datasheet-149524.pdf?src-supplier=Texas+Instruments, ComponentLink5URL=https://datasheet.octopart.com:443/TPS61090RSAR-Texas-Instruments-datasheet-149524.pdf?src-supplier=Texas+Instruments, ComponentLink6Description=https://datasheet.octopart.com:443/TPS61090RSAR-Texas-Instruments-datasheet-128166.pdf?src-supplier=Texas+Instruments, ComponentLink6URL=https://datasheet.octopart.com:443/TPS61090RSAR-Texas-Instruments-datasheet-128166.pdf?src-supplier=Texas+Instruments, ComponentLink7Description=https://datasheet.octopart.com:443/TPS61090RSAR-Texas-Instruments-datasheet-34157647.pdf?src-supplier=Newark, ComponentLink7URL=https://datasheet.octopart.com:443/TPS61090RSAR-Texas-Instruments-datasheet-34157647.pdf?src-supplier=Newark, ComponentLink8Description=https://datasheet.octopart.com:443/TPS61090RSAR-Texas-Instruments-datasheet-21222488.pdf?src-supplier=Newark, ComponentLink8URL=https://datasheet.octopart.com:443/TPS61090RSAR-Texas-Instruments-datasheet-21222488.pdf?src-supplier=Newark, ComponentLink9Description=https://datasheet.octopart.com:443/TPS61090RSAR-Texas-Instruments-datasheet-14439414.pdf?src-supplier=Upverter, ComponentLink9URL=https://datasheet.octopart.com:443/TPS61090RSAR-Texas-Instruments-datasheet-14439414.pdf?src-supplier=Upverter, ComponentLink10Description=https://datasheet.octopart.com:443/TPS61090RSAR-Texas-Instruments-datasheet-66807785.pdf?src-supplier=Farnell, ComponentLink10URL=https://datasheet.octopart.com:443/TPS61090RSAR-Texas-Instruments-datasheet-66807785.pdf?src-supplier=Farnell, ComponentLink11Description=https://datasheet.octopart.com:443/TPS61090RSAR-Texas-Instruments-datasheet-14167026.pdf?src-supplier=iiiC, ComponentLink11URL=https://datasheet.octopart.com:443/TPS61090RSAR-Texas-Instruments-datasheet-14167026.pdf?src-supplier=iiiC, ComponentLink12Description=https://datasheet.octopart.com:443/TPS61090RSAR-Texas-Instruments-datasheet-61172.pdf?src-supplier=DigiKey, ComponentLink12URL=https://datasheet.octopart.com:443/TPS61090RSAR-Texas-Instruments-datasheet-61172.pdf?src-supplier=DigiKey, ComponentLink13Description=https://datasheet.octopart.com:443/TPS61090RSAR-Texas-Instruments-datasheet-112952.pdf?src-supplier=Sierra+IC, ComponentLink13URL=https://datasheet.octopart.com:443/TPS61090RSAR-Texas-Instruments-datasheet-112952.pdf?src-supplier=Sierra+IC, ComponentLink14Description=http://sigma.octopart.com:80/conflict_mineral_statement/Texas-Instruments-company-63.pdf?src-supplier=Compliance+Statements, ComponentLink14URL=http://sigma.octopart.com:80/conflict_mineral_statement/Texas-Instruments-company-63.pdf?src-supplier=Compliance+Statements, ComponentLink15Description=http://sigma.octopart.com:80/reach_statement/Texas-Instruments-company-64.pdf?src-supplier=Compliance+Statements, ComponentLink15URL=http://sigma.octopart.com:80/reach_statement/Texas-Instruments-company-64.pdf?src-supplier=Compliance+Statements, Efficiency=96%, Height=1mm, Length=4mm, Lifecycle Status=Production, Manufacturer Part Number=TPS61090RSAR, Max Supply Voltage=5.5V, Min Output Voltage=1.8V, Mounting Technology="Surface Mount", Number of Outputs=1, Operating Supply Voltage=5.5V, Output Configuration=Positive, Output Type=Adjustable, Output Voltage=5.5V, Packaging="Tape & Reel", Pins=16, Pricing="1=2,71, 10=2,022, 25=1,8492, 100=1,6598, 250=1,56936, 500=1,51484, 1000=1,46998 (USD)", Radiation Hardening=No, RoHS=Compliant, Schedule B=8542390000, Stock=9675, Supplier=DigiKey, Supplier 1=DigiKey, Supplier Part Number 1=296-15259-1-ND, Synchronous Rectifier=Yes, Thickness=900µm, Topology=Boost, Weight=41.503702mg, Width=4mm